# Altium PCB CH340S25P-R0.PcbDoc
Units mil, origin at the board's own origin, x right, y up, seen from the top; angles counter-clockwise.
Board outline 1460 x 845 mil, 2 copper layers (TopLayer, BottomLayer); 10 components, 26 nets, 73 pads, 31 vias.
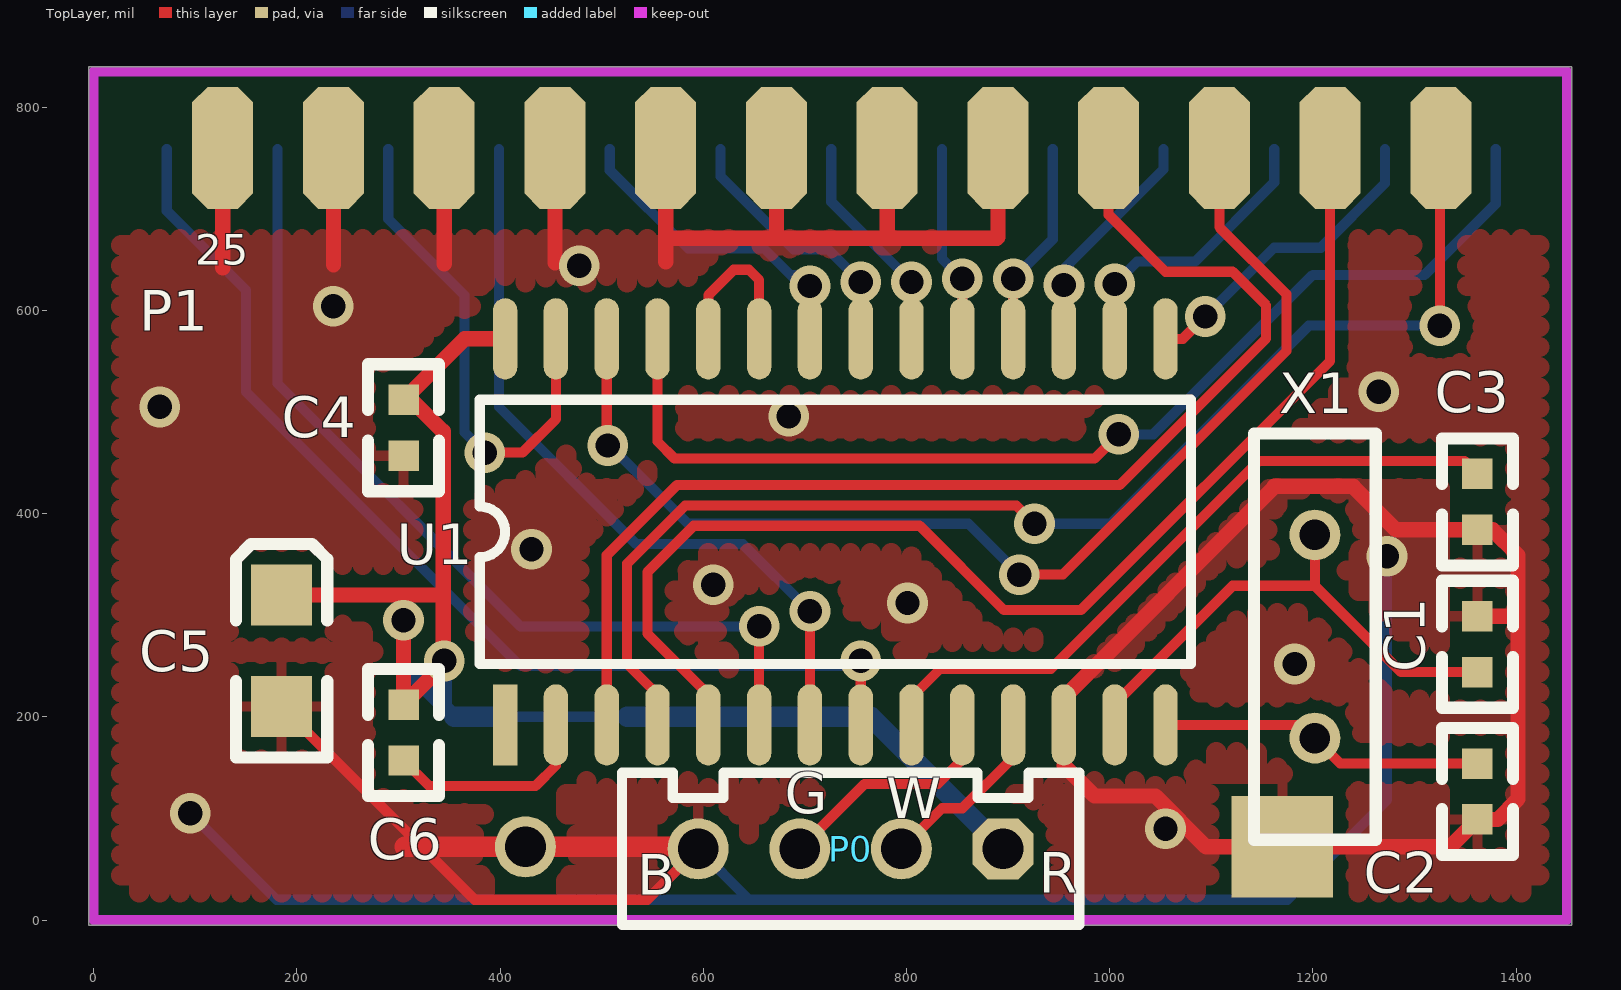
[diagram p0: TopLayer view]
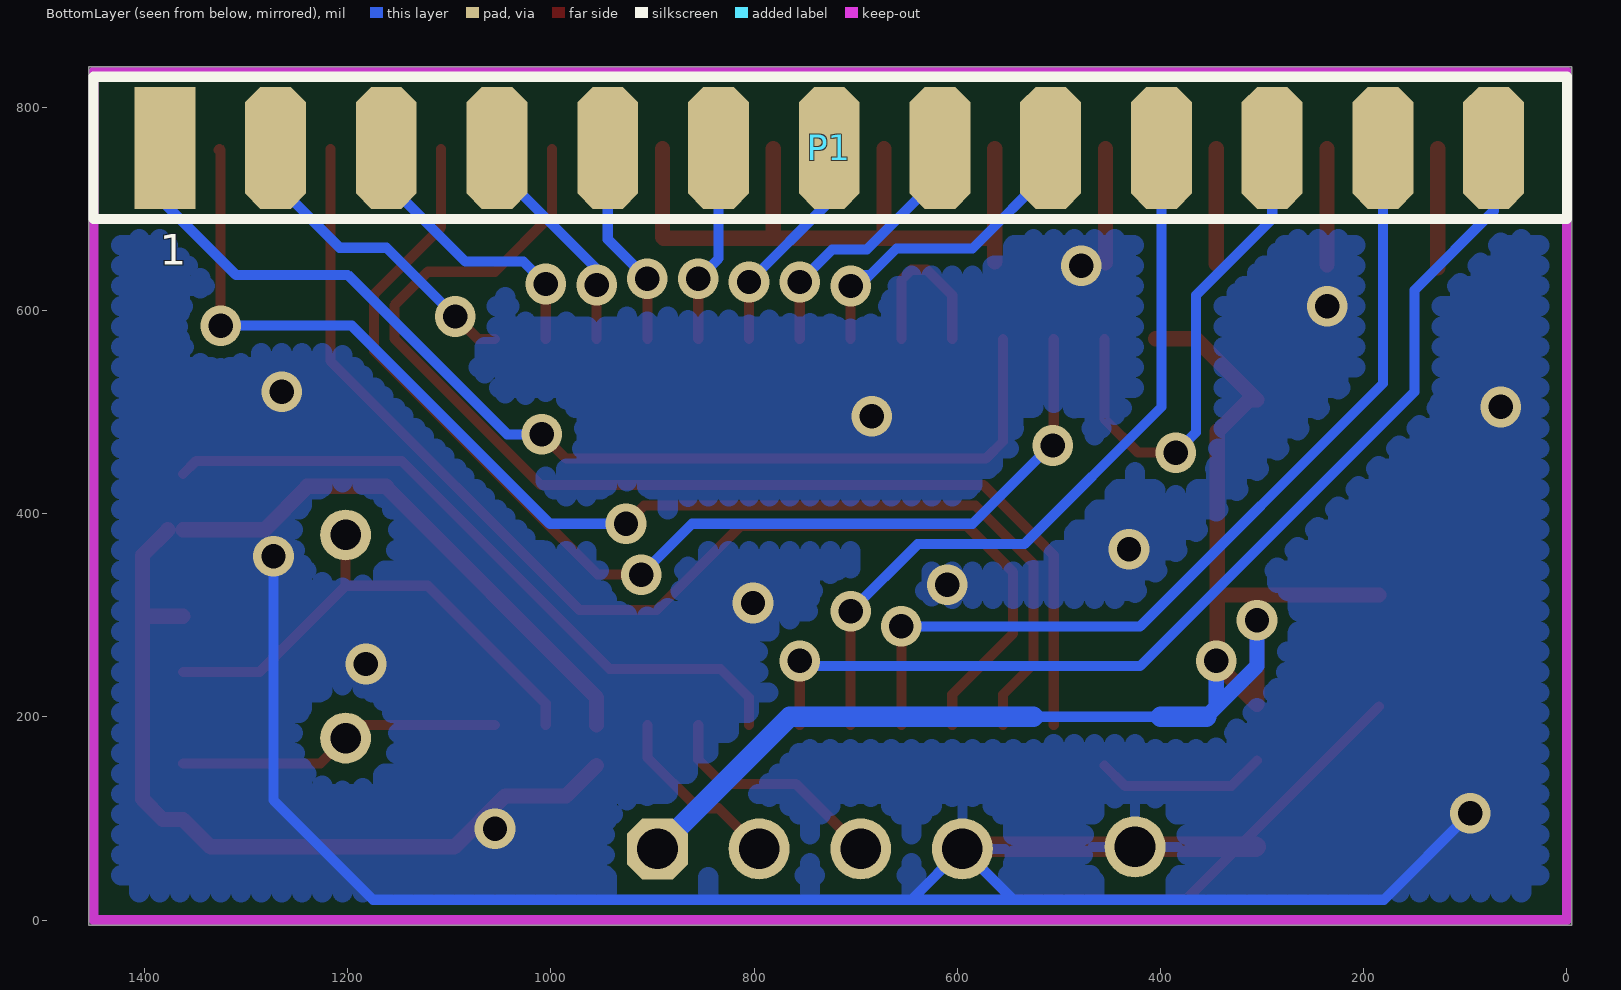
[diagram p1: BottomLayer view, seen from below]

## Layer stack, top to bottom
TopSolder: solder mask 0.4, Solder Resist, Dk 3.5
TopLayer: signal copper 1.4
Dielectric1: dielectric 12.6, FR-4, Dk 4.8
BottomLayer: signal copper 1.4
BottomSolder: solder mask 0.4, Solder Resist, Dk 3.5

## Board outline
-5,-5 1455,-5 1455,840 -5,840

## Design rules (kind name [scope] priority, off if disabled: settings)
Clearance Clearance_1 [(InPoly)] p1: gap=12 ignorepadtopadclearanceinfootprint=FALSE
Clearance [All] p2: gap=10 ignorepadtopadclearanceinfootprint=FALSE
ComponentClearance [All] p1 off: gap=10 collisioncheckmode=3 verticalgap=10 showdistances=FALSE
FabricationTestPointUsage TestPointUsage [All] p1: valid=0 allowmultiple=FALSE
FabricationTestpoint Testpoint [All] p1: side=3 testpointundercomponent=TRUE minsize=40 maxsize=100 preferedsize=60 minholesize=20 maxholesize=40 preferedholesize=32 testpointgrid=1 allowsidetop=TRUE allowsidebottom=TRUE usegrid=TRUE gridtolerance=0.01
PolygonConnect [All] p1: connectstyle=Relief reliefconductorwidth=10 reliefentries=4 polygonreliefangle="90 Angle" airgapwidth=10
RoutingPriority [All] p1: routingpriority=4
RoutingVias [All] p1: holewidth=24 width=40 viastyle="Through Hole" minholewidth=24 minwidth=40 maxholewidth=28 maxwidth=40
SolderMaskExpansion [All] p1: expansion=4 istentingtop=FALSE
Width Width_3 [InNet('VCC')] p1: maxlimit=30 minlimit=8 preferedwidth=20
Width Width_1 [InNet('GND')] p2: maxlimit=30 minlimit=8 preferedwidth=20
Width [All] p3: maxlimit=30 minlimit=8 preferedwidth=10
26 further rules are at their usual default settings.

## Components (designator, comment, footprint, x,y, rotation, side; value= is the part's Value field where it differs from the comment)
C1 "33p" 0603 1362,299 r270 top
C2 "33p" 0603 1362,99 r90 top
C3 "0.1uF" 0603 1362,439 r270 top
C4 "0.1uF" 0603 305,512 r270 top
C5 "10uF" 3216 185,320 r90 top
C6 "0.1uF" 0603 305,212 r270 top
P0 "USB" SIP04 895,70 r270 top
P1 "1284A" 1284A-DB25 1380,760 r180 bottom
U1 "CH340S" SOP28 405,192 r90 top
X1 "12MHz" XTAL1 1202,179 r180 top

## Footprints (in the part's own frame and the unit in brackets; to place one, negate y for a bottom-side part, rotate by r counter-clockwise, add the part's x,y. Pads: shape width x height; smd on the part's side, far side on the other; paste and mask are expansions set on the pad)
0603 [mil]
  rect 30x30 smd: 1(0,0) 2(55,0)
  silkscreen extent -35,-35 90,35
1284A-DB25 [mil]
  rect 60x120 smd: 1(0,0)
  oct 60x120 smd: 2(109,0) 3(218,0) 4(327,0) 5(436,0) 6(545,0) 7(654,0) 8(763,0) 9(872,0) 10(981,0) 11(1090,0) 12(1199,0) 13(1308,0)
  oct 60x120 smd far side: 14(54,0) 15(163,0) 16(272,0) 17(381,0) 18(490,0) 19(599,0) 20(708,0) 21(817,0) 22(926,0) 23(1035,0) 24(1144,0) 25(1253,0)
  silkscreen extent -70,-70 1380,70
3216 [mil]
  rect 60x60 smd: 1(0,0) 2(-110,0)
  silkscreen extent -160,-45 50,45
SIP04 [mil]
  oct 60x60 hole 40: 1(0,0)
  round 60 hole 40: 2(0,-100) 3(0,-200) 4(0,-300)
  silkscreen extent -75,-375 75,75
SOP28 [mil]
  rect 80x24 smd: 1(0,0)
  oval 80x24 smd: 2(0,-50) 3(0,-100) 4(0,-150) 5(0,-200) 6(0,-250) 7(0,-300) 8(0,-350) 9(0,-400) 10(0,-450) 11(0,-500) 12(0,-550) 13(0,-600) 14(0,-650) 15(380,-650) 16(380,-600) 17(380,-550) 18(380,-500) 19(380,-450) 20(380,-400) 21(380,-350) 22(380,-300) 23(380,-250) 24(380,-200) 25(380,-150) 26(380,-100) 27(380,-50) 28(380,0)
  silkscreen extent 60,-675 320,25
XTAL1 [mil]
  round 50 hole 30: 1(0,0) 2(0,-200)
  silkscreen extent -60,-300 60,100

## Part data
C1 C2 C3 C6: library part CAP
C4 C5: library part CAP, "Capacitor"
U1: library part CH340S_P
X1: library part CRYSTAL, "Crystal"

## Free pads (board coordinates)
  round 60 hole 40: 0(425,72)
  rect 100x100 smd: 1(1170,72)

## Via types
v1: diameter 40, hole 24, TopLayer to BottomLayer, 31 vias

## Nets (pads, with @x,y where several pads share a name; then routed paths per layer and width w, separated by ;. In a path a pad name is that pad's centre, name@x,y a point inside that pad or via, vN(x,y) a via of type N, cw(c..) or ccw(c..) an arc to the next point about the centre after c; other vN are vias at no path point)
ACK#: P1.10 U1.7 | length 755.3
  TopLayer w10: U1.7 v1(705,304)
  BottomLayer w10: P1.10@399,759 399,505 534,370 639,370 v1(705,304)
AFD#: P1.14 U1.4 | length 1258.9
  TopLayer w10: U1.4 555,222 525,252 525,350.72 582.28,408 908,408 v1(926,390) ; v1(1325,585) 1325,758 1326,759 P1.14@1327,758
  BottomLayer w10: v1(926,390) 1001,390 1196,585 v1(1325,585)
BUSY: P1.11 U1.27 | length 501
  TopLayer w10: v1(385,460) 422,460 455,493 U1.27
  BottomLayer w10: P1.11@290,759 290,690 365,615 365,480 v1(385,460)
D0: P1.2 U1.15 | length 313.4
  TopLayer w10: U1.15 1072,572 v1(1094,594)
  BottomLayer w10: v1(1094,594) 1161.72,661.72 1207.72,661.72 1271,725 P1.2@1271,759
D1: P1.3 U1.16 | length 285.4
  TopLayer w10: U1.16 v1(1005,626)
  BottomLayer w10: v1(1005,626) 1027,648 1084,648 1162,726 P1.3@1162,759
D2: P1.4 U1.17 | length 227.6
  TopLayer w10: U1.17 v1(955,625)
  BottomLayer w10: v1(955,625) 955,641 1053,739 P1.4@1053,759
D3: P1.5 U1.18 | length 203.2
  TopLayer w10: U1.18 v1(905,631)
  BottomLayer w10: v1(905,631) 944,670 P1.5@944,759
D4: P1.6 U1.19 | length 195.3
  TopLayer w10: U1.19 v1(855,631)
  BottomLayer w10: P1.6@835,759 835,651 v1(855,631)
D5: P1.7 U1.20 | length 219.7
  TopLayer w10: U1.20 v1(805,628)
  BottomLayer w10: P1.7@726,759 726,707 v1(805,628)
D6: P1.8 U1.21 | length 264.1
  TopLayer w10: U1.21 v1(755,628)
  BottomLayer w10: P1.8@617,759 617,732 689,660 723,660 v1(755,628)
D7: P1.9 U1.22 | length 332.8
  TopLayer w10: U1.22 v1(705,624)
  BottomLayer w10: P1.9@508,759 508,738 585,661 659.72,661 v1@696.72,624 ; 685.72,635 694,635 v1(705,624)
ERR#: P1.15 U1.5 | length 1210.9
  TopLayer w10: U1.5 605,222 545,282 545,342.43 590.57,388 813,388 896,305 971.72,305 1217,550.28 P1.15@1217,759
GND: C1.1 C2.1 C3.2 C4.2 C5.2 P0.4 P1.18 P1.19 P1.20 P1.21 P1.22 P1.23 P1.24 P1.25 pad.0 pad.1 U1.12 | length 4944.4
  TopLayer w10: C5.2 375,20 545,20 P0.4
  TopLayer w15: 127,642 P1.25@127,759 ; 236,645 P1.24@236,759 ; 345,646 P1.23@345,759 ; 454,647 P1.22@454,759 ; 563,648 P1.21@563,759 ; 563,671 889,671 890,672 P1.18@890,759 ; 670,671 672,673 P1.20@672,759 ; P1.19@781,759 781,672 782,671 ; 955,152 985,122 1045,122 1095,72 1335,72 C2.1 1382,99 1402,119 1402,359 1377,384 ; U1.12 955,219 1162,426 ; 1162,427 1240,427 ; 1240,426 1282,384 C3.2 ; C1.1 1402,299
  TopLayer w20: 306,72 P0.4@595,72
  BottomLayer w10: v1(95,105) 180,20 645,20 ; 545,20 P0.4 645,20 ; v1(1273,358) 1273,118 1175,20 645,20
  other v1: 1055,90 1182,252 801,312 610,330 431,365 684,496 65,505 1265,520 236,604 478,644
INI#: P1.16 U1.26 | length 1143.5
  TopLayer w10: U1.26 505,468 v1(506,467) ; v1(911,340) 954,340 1174,560 1174,616 1108,682 P1.16@1108,759
  BottomLayer w10: v1(506,467) 508,467 585,390 861,390 v1(911,340)
NetU1_24: U1.23 U1.24 | length 165.5
  TopLayer w10: U1.24 605,615 630,640 645,640 655,630 U1.23
NetX1_1: C2.2 U1.14 X1.1 | length 322.7
  TopLayer w10: U1.14 1189,192 1227,154 C2.2
NetX1_2: C1.2 U1.13 X1.2 | length 511.3
  TopLayer w10: U1.13 1005,213 1121,329 1202,329 ; X1.2 1202,329 ; C1.2 1287,244 1202,329
PEMP: P1.12 U1.6 | length 901
  TopLayer w10: U1.6 v1(655,289)
  BottomLayer w10: P1.12@181,759 181,528 420,289 v1(655,289)
RSTI: C6.2 U1.2 | length 168.6
  TopLayer w10: C6.2 330,132 435,132 455,152
SIN#: P1.17 U1.3 | length 1193.9
  TopLayer w10: U1.3 505,359 574,428 1009.72,428 1154,572.28 1154,605 1121,638 1055,638 999,694 P1.17@999,759
SLCT: P1.13 U1.8 | length 1061.7
  TopLayer w10: U1.8 v1(755,255)
  BottomLayer w10: P1.13@72,759 72,698 150,620 150,520 420,250 750,250 v1(755,255) v1@749,261
STB#: P1.1 U1.25 | length 1090.9
  TopLayer w10: U1.25 555,471 571.86,454.14 985.14,454.14 v1(1009,478)
  BottomLayer w10: v1(1009,478) 1043,478 1200,635 1310,635 1380,705 P1.1@1380,759
UD+: P0.3 U1.10 | length 230.5
  TopLayer w10: P0.3 759,134 831,134 855,158 U1.10
UD-: P0.2 U1.11 | length 179.3
  TopLayer w10: P0.2 835,110 855,110 905,160 U1.11
V3: C3.1 U1.9 | length 685.8
  TopLayer w10: U1.9 805,219 833,247 942,247 1146.92,451.92 1349.08,451.92 C3.1
VCC: C4.1 C5.1 C6.1 P0.1 U1.28 | length 1483.4
  TopLayer w15: C5.1 344,320 ; 305,320 C6.1 344,251 344,481 313,512 C4.1 365,572 U1.28
  BottomLayer w10: 400,200 525,200
  BottomLayer w15: v1(305,295) 305,250 355,200 ; 345,210 v1(345,255)
  BottomLayer w20: 355,200 400,200 ; 525,200 765,200 P0.1
pads on no net: U1.1

## Polygon pours and split planes (outlines as drawn)
GND on BottomLayer "BottomLayer-GND" (hatched 90Degree grid 20 track 20, remove dead copper, pour order 1): 0,0 1450,0 1450,670 0,670
GND on TopOverlay (hatched 90Degree grid 20 track 8, remove dead copper): -95,660
GND on TopLayer "TopLayer-GND" (hatched 90Degree grid 20 track 20, remove dead copper, pour order 0): 0,0 1450,0 1450,670 0,670

## Keep-outs
KeepOutLayer:
  lines w10: 0,832 0,0 1450,0 1450,835 0,835

## Silkscreen, mask and mechanical layers (free items; w line width, h text height)
TopOverlay:
  text "25" at 100,645 h30
  text "G" at 680,105 h40
  text "W" at 780,100 h40
  text "R" at 930,27 h40
  text "B" at 535,25 h40
BottomOverlay:
  text "1" at 1385,645 h30
Mechanical1:
  lines w10: 0,0 0,835 1450,835 1450,0 0,0